# Altium PCB PlytkaUV11.PcbDoc
Units mm, origin at the board's own origin, x right, y up, seen from the top; angles counter-clockwise.
Board outline 20 x 20 mm, 2 copper layers (Top Layer, Bottom Layer); 10 components, 7 nets, 37 pads, 12 vias.
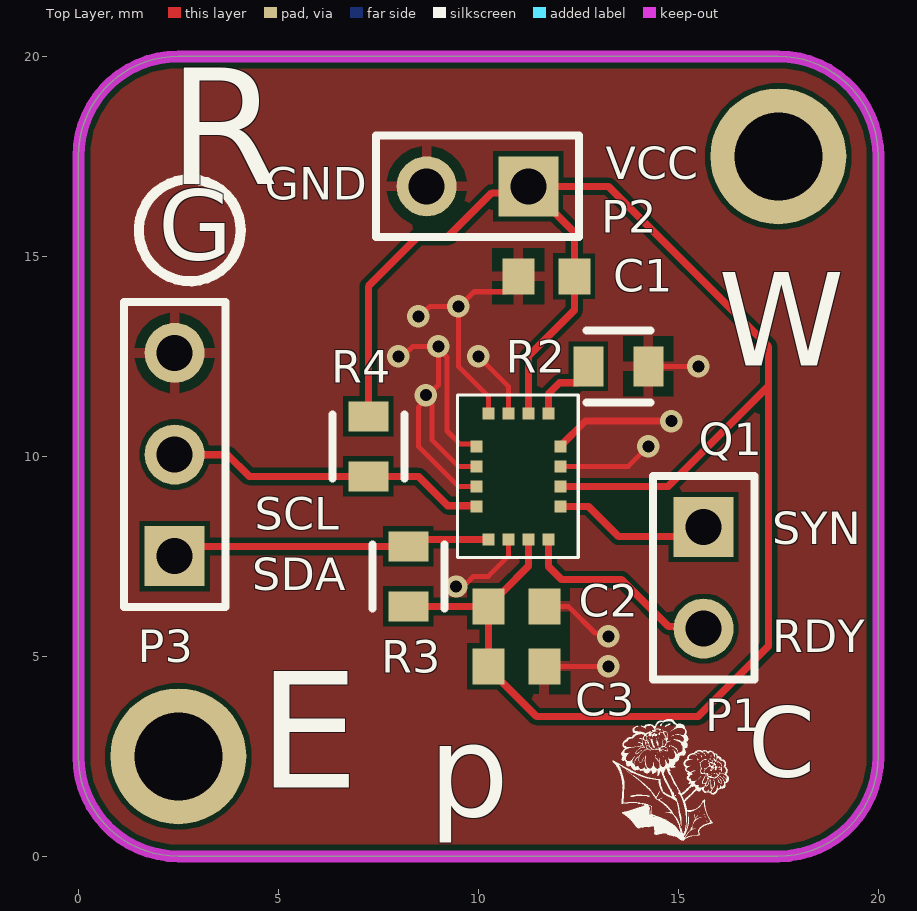
[diagram p0: Top Layer view]
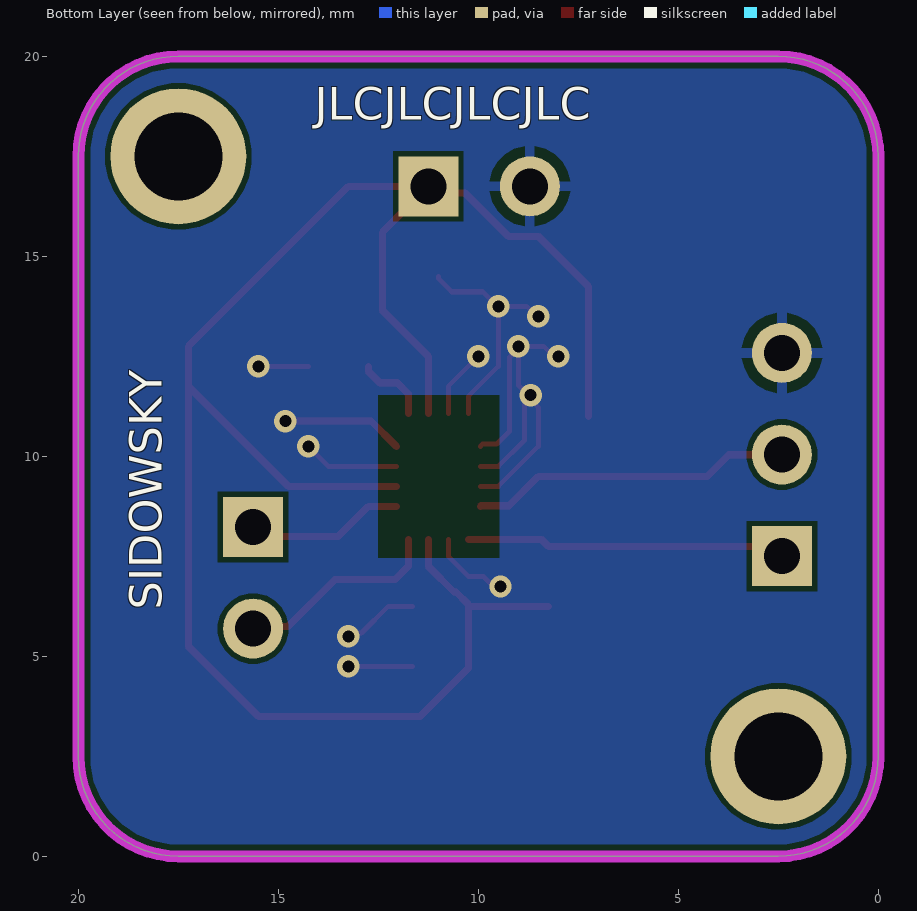
[diagram p1: Bottom Layer view, seen from below]

## Layer stack, top to bottom
Top Solder: solder mask 0.0102, Solder Resist, Dk 3.5
Top Layer: signal copper 0.0356
Dielectric 1: dielectric 0.32, FR-4, Dk 4.8
Bottom Layer: signal copper 0.0356
Bottom Solder: solder mask 0.0102, Solder Resist, Dk 3.5

## Board outline
2.5,0 cw(c2.5,2.5) 0,2.5 0,17.5 cw(c2.5,17.5) 2.5,20 17.5,20 cw(c17.5,17.5) 20,17.5 20,2.5 cw(c17.5,2.5) 17.5,0

## Design rules (kind name [scope] priority, off if disabled: settings)
BoardOutlineClearance [All] p1: gap=0.3 ignorepadtopadclearanceinfootprint=FALSE
Clearance [All] p1: gap=0.127 ignorepadtopadclearanceinfootprint=TRUE
MinimumSolderMaskSliver [All] p1: minsoldermaskwidth=0.08
PlaneConnect [All] p1: planeconnectstyle=Direct reliefexpansion=0.508 reliefentries=4 reliefconductorwidth=0.254 reliefairgap=0.508
PolygonConnect [All] p1: thpad.connectstyle=Relief thpad.reliefconductorwidth=0.254 thpad.reliefentries=4 thpad.polygonreliefangle="90 Angle" thpad.airgapwidth=0.254 smdpad.connectstyle=Relief smdpad.reliefconductorwidth=0.254 smdpad.reliefentries=4 smdpad.polygonreliefangle="90 Angle" smdpad.airgapwidth=0.254 via.connectstyle=Direct via.reliefconductorwidth=0.254 via.reliefentries=4 via.polygonreliefangle="90 Angle" via.airgapwidth=0.254
RoutingVias [All] p1: holewidth=0.3 width=0.56 viastyle="Through Hole" minholewidth=0.3 minwidth=0.56 maxholewidth=2 maxwidth=2
SilkToSolderMaskClearance [IsPad] p1: minsilkscreentomaskgap=0.15 clearancetoexposedcopper=TRUE
SolderMaskExpansion [All] p1: expansion=0.05 istentingtop=FALSE
UnRoutedNet [All] p1: checkbadconnections=TRUE
Width [All] p1: maxlimit=0.254 minlimit=0.127 preferedwidth=0.127
26 further rules are at their usual default settings.

## Components (designator, comment, footprint, x,y, rotation, side; value= is the part's Value field where it differs from the comment)
C1 "100nF" 1608[0603] 11.7,14.5 r0 top
C2 "100nF" 1608[0603] 10.95,6.25 r0 top
C3 "100nF" 1608[0603] 10.95,4.75 r0 top
P1 "GPIO" HDR1X2 15.631,8.232 r270 top
P2 "ANALOG" HDR1X2 11.25,16.75 r180 top
P3 "I2C" HDR1X3 2.41,7.505 r90 top
Q1 "CzujnikUV" AS7331 11,9.5 r0 top
R2 "3.3M" FP-CRCW0603-e3-MFG 13.5,12.25 r0 top
R3 "4k7" FP-CRCW0603-e3-MFG 8.25,7 r90 top
R4 "4k7" FP-CRCW0603-e3-MFG 7.25,10.25 r270 top

## Footprints (in the part's own frame and the unit in brackets; to place one, negate y for a bottom-side part, rotate by r counter-clockwise, add the part's x,y. Pads: shape width x height; smd on the part's side, far side on the other; paste and mask are expansions set on the pad)
1608[0603] [mm] "Chip Capacitor, Body 1.6x0.8mm, IPC High Density"
  rect 0.8x0.9 smd: 1(-0.7,0) 2(0.7,0)
  body extent -0.87,-0.48 0.87,0.48, height 1.3
AS7331 [mm] "Może zadziała"
  rect 0.3x0.3 smd: 1(-0.75,1.575) 2(-0.25,1.575) 3(0.25,1.575) 4(0.75,1.575) 5(1.05,0.75) 6(1.05,0.25) 7(1.05,-0.25) 8(1.05,-0.75) 9(0.75,-1.575) 10(0.25,-1.575) 11(-0.25,-1.575) 12(-0.75,-1.575) 13(-1.05,-0.75) 14(-1.05,-0.25) 15(-1.05,0.25) 16(-1.05,0.75)
  silkscreen extent -1.52,-2.03 1.5,2.03, body extent -1.3,-1.83 1.3,1.83, height 1.2
FP-CRCW0603-e3-MFG [mm]
  rect 0.75x1 smd paste+0 mask+0: 1(-0.75,0) 2(0.75,0)
  silkscreen extent -0.8,-0.9 0.8,0.9, body extent -1.22,-0.6 1.22,0.6, height 0.25
HDR1X2 [mm] "Connector; Header; 2 Position"
  rect 1.5x1.5 hole 0.9: 1(0,0)
  round 1.5 hole 0.9: 2(2.54,0)
  silkscreen extent -1.27,-1.27 3.81,1.27
HDR1X3 [mm] "Connector; Header; 3 Position"
  rect 1.5x1.5 hole 0.9: 1(0,0)
  round 1.5 hole 0.9: 2(2.54,0) 3(5.08,0)
  silkscreen extent -1.27,-1.27 6.35,1.27

## Part data
C1 C2 C3: library part "Cap Semi", "Capacitor (Semiconductor SIM Model)", LatestRevisionDate=29-May-2009, LatestRevisionNote="IPC-7351 Footprint Added.", PackageDescription="Chip Capacitor", PackageReference=C1206, Published=8-Jun-2000, Publisher="Altium Limited"
P1 P2: library part "Header 2", "Header, 2-Pin", LatestRevisionDate=17-Jul-2002, LatestRevisionNote="Re-released for DXP Platform.", Publisher="Altium Limited"
P3: library part "Header 3", "Header, 3-Pin", LatestRevisionDate=17-Jul-2002, LatestRevisionNote="Re-released for DXP Platform.", Publisher="Altium Limited"
R2 R3 R4: library part CMP-2000-03525-2, "RES Thick Film, 10kΩ, 1%, 0.1W, 100ppm/°C, 0603", Case Code (Imperial)=0603, Case Code (Metric)=1608, Max Operating Temperature=155°C, Max Power Dissipation=100mW, Min Operating Temperature=-55°C, Package Quantity=10, Resistance=66.5kR, Temperature Coefficient=100ppm/°C, Tolerance=1%, Voltage Rating=75V, Case/Package=0603, Composition="Thick Film", Contact Plating=Tin, Depth=0.85mm, Features="Automotive AEC-Q200", Height=0.45mm, Length=1.55mm, Military Standard=Not, Number of Pins=2, Number of Terminations=2, Packaging="Tape and Reel", Power Rating=100mW, Radiation Hardening=No, Termination=SMD/SMT, Weight=7.1E-05oz, Width=0.85mm, Working Voltage=75V

## Free pads (board coordinates)
  round 3.4 hole 2.2: 0(2.5,2.5) 0(17.5,17.5)

## Via types
v1: diameter 0.56, hole 0.3, Top Layer to Bottom Layer, tented both sides, 12 vias

## Nets (pads, with @x,y where several pads share a name; then routed paths per layer and width w, separated by ;. In a path a pad name is that pad's centre, name@x,y a point inside that pad or via, vN(x,y) a via of type N, cw(c..) or ccw(c..) an arc to the next point about the centre after c; other vN are vias at no path point)
GND: C1.1 C2.2 C3.2 P2.2 P3.3 Q1.1 Q1.2 Q1.5 Q1.6 Q1.11 Q1.14 Q1.15 Q1.16 R2.2 | length 31.1
  Top Layer w0.127: v1(8,12.5) 8.117,12.5 8.367,12.75 8.946,12.75 8.963,12.767 8.963,12.735 v1@9,12.698 ; v1(8.5,13.5) 8.541,13.5 8.791,13.75 v1(9.5,13.75) ; v1(8.691,11.531) 8.691,11.414 8.5,11.224 8.5,10.25 9.5,9.25 Q1.14 ; v1(9,12.75) v1@9,12.698 ; v1(9.446,6.746) 9.528,6.829 9.709,6.829 9.881,7 10.25,7 10.75,7.5 Q1.11 ; Q1.15 9.5,9.75 8.846,10.404 8.846,11.628 9,11.782 v1@9,12.698 ; Q1.16 9.895,10.305 9.548,10.305 9.217,10.636 9.217,12.481 v1@9,12.698 ; v1(10,12.5) 10.75,11.75 Q1.2 ; Q1.1 10.25,11.5 9.5,12.25 v1(9.5,13.75) ; C1.1 11,14.45 10.663,14.113 9.892,14.113 9.528,13.75 v1(9.5,13.75) ; C3.2 v1(13.25,4.75) ; C2.2 12.25,6.25 12.919,5.581 13.169,5.581 v1(13.25,5.5) ; Q1.6 13.75,9.75 v1(14.25,10.25) ; R2.2 v1(15.5,12.25)
  Top Layer w0.178: Q1.5 12.68,10.88 v1(14.825,10.88)
RDY: P1.2 Q1.9 | length 5.2
  Top Layer w0.178: Q1.9 11.75,7.25 12.084,6.916 13.584,6.916 14.75,5.75 15.573,5.75 P1.2
REXT: Q1.4 R2.1 | length 1.8
  Top Layer w0.178: Q1.4 11.75,11.561 12.028,11.839 12.464,11.839 12.75,12.125 R2.1
SCL: P3.2 Q1.13 R4.2 | length 8
  Top Layer w0.178: P3.2@2.5,10.04 3.732,10.04 4.272,9.5 8.5,9.5 9.236,8.764 9.936,8.764 Q1.13
SDA: P3.1 Q1.12 R3.2 | length 8
  Top Layer w0.178: P3.1 2.655,7.75 R3.2 8.425,7.925 Q1.12
SYN: P1.1 Q1.8 | length 4
  Top Layer w0.178: Q1.8 12.75,8.75 13.5,8 15.399,8 P1.1
VCC: C1.2 C2.1 C3.1 P2.1 Q1.3 Q1.7 Q1.10 R3.1 R4.1 | length 50.2
  Top Layer w0.178: R4.1 7.25,14.25 8.5,15.5 9.25,15.5 10.337,16.587 11.087,16.587 P2.1 ; R3.1 C2.1 ; Q1.10 11.25,7.25 10.611,6.611 10.561,6.611 10.25,6.3 C2.1 ; Q1.3 11.25,12.5 12.4,13.65 C1.2 12.4,15.6 P2.1 ; Q1.7 14.75,9.25 17.25,11.75 ; C2.1 C3.1 10.25,4.7 11.45,3.5 15.5,3.5 17.25,5.25 17.25,11.75 ; P2.1 13.25,16.75 17.25,12.75 17.25,11.75

## Polygon pours and split planes (outlines as drawn)
GND on Bottom Layer "BOTTOM" (solid, pour order 1): 0,20 20,20 20,0 0,0
GND on Top Layer "VCC" (solid, pour order 2): 0.25,19.75 20,20 20,0 0,0

## Keep-outs
Keep-Out Layer:
  the board outline again, w0.3

## Other copper
Multi-Layer:
  pour cut-out: 9.476,11.532 12.499,11.532 12.499,7.468 9.476,7.468

## Silkscreen, mask and mechanical layers (free items; w line width, h text height)
Top Overlay:
  drawing of 28 lines, arcs and shapes, not listed
  text "VCC" at 13.184,16.924 h0.81
  text "GND" at 4.66,16.41 h0.81
  text "R" at 2.25,15.837 h5
  text "G" at 2,14.342 h3
  text "W" at 16,11.5 h4
  text "SCL" at 4.41,8.16 h0.81
  text "SYN" at 17.351,7.8 h0.81
  text "SDA" at 4.354,6.653 h0.81
  text "RDY" at 17.351,5.105 h0.81
  text "C" at 16.749,1.415 h3
  text "E" at 4.5,0.75 h5
  text "p" at 8.75,0.235 h4
Bottom Overlay:
  text "JLCJLCJLCJLC" at 14.09,18.41 h0.81
  text "SIDOWSKY" at 17.91,6.16 h0.81 r270
Mechanical 1:
  lines w0.254: 20,2.5 ccw(c20,2.5) 20,2.5 ; 17.5,20 ccw(c17.5,20) 17.5,20 ; 17.5,20 cw(c17.5,17.5) 20,17.5 20,2.5 ; 17.5,20 2.5,20 ccw(c2.5,17.5) 0,17.5 0,2.5 ccw(c2.5,2.5) 2.5,0 17.5,0 ccw(c17.5,2.5) 20,2.5